# Altium PCB PCB1.PcbDoc
Units mm, origin at the board's own origin, x right, y up, seen from the top; angles counter-clockwise.
Board outline 72.9 x 64.01 mm, 4 copper layers (Top Layer, GND Plane, Power, Bottom Layer), stack 1.369 mm thick; 67 components, 38 nets, 236 pads, 0 vias.
Unrouted connection lines stored in the file: 150.
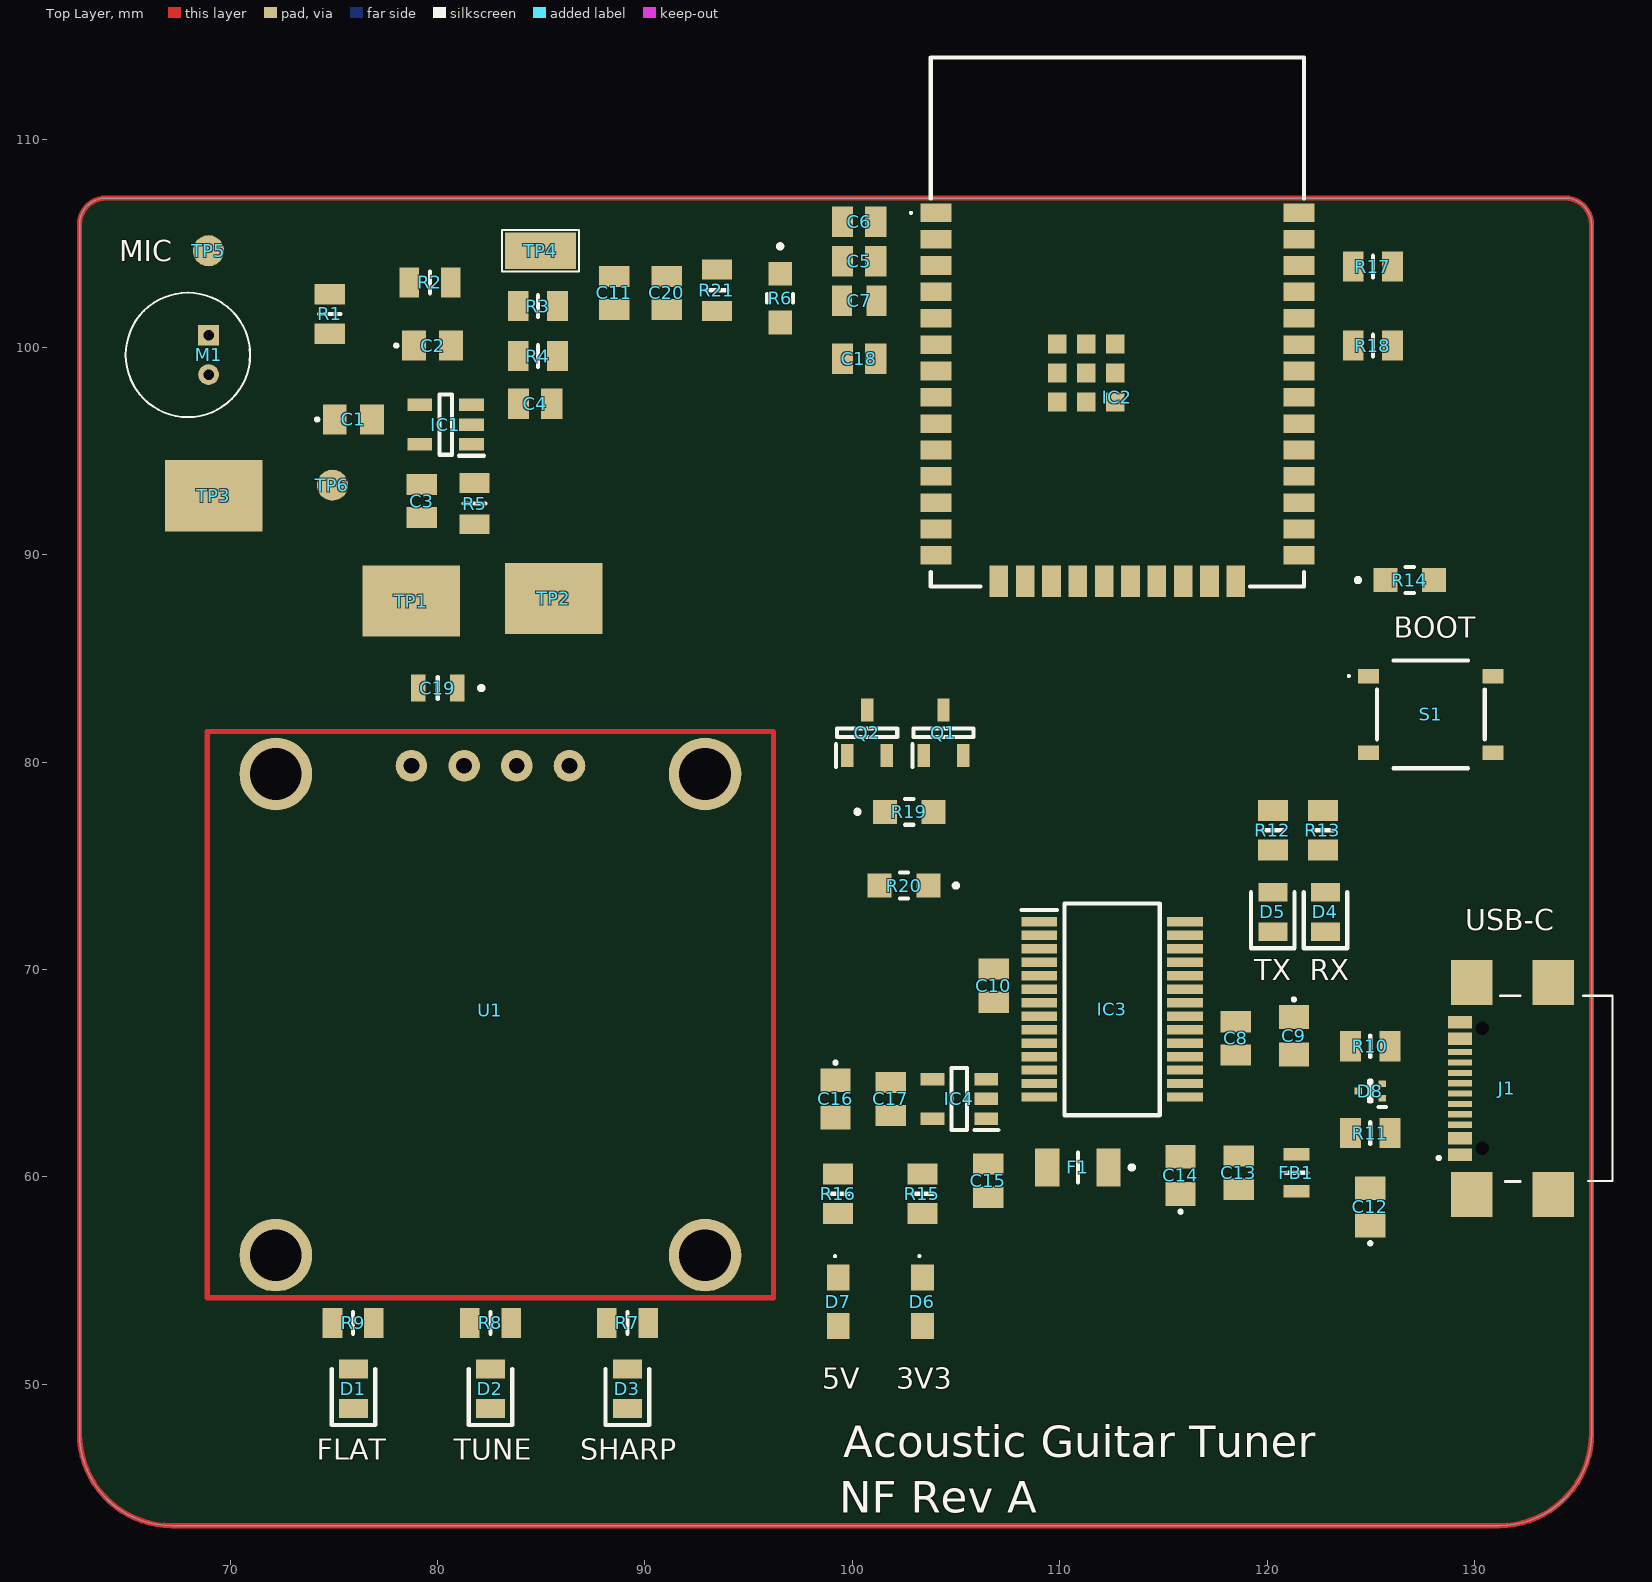
[diagram p0: Top Layer view]
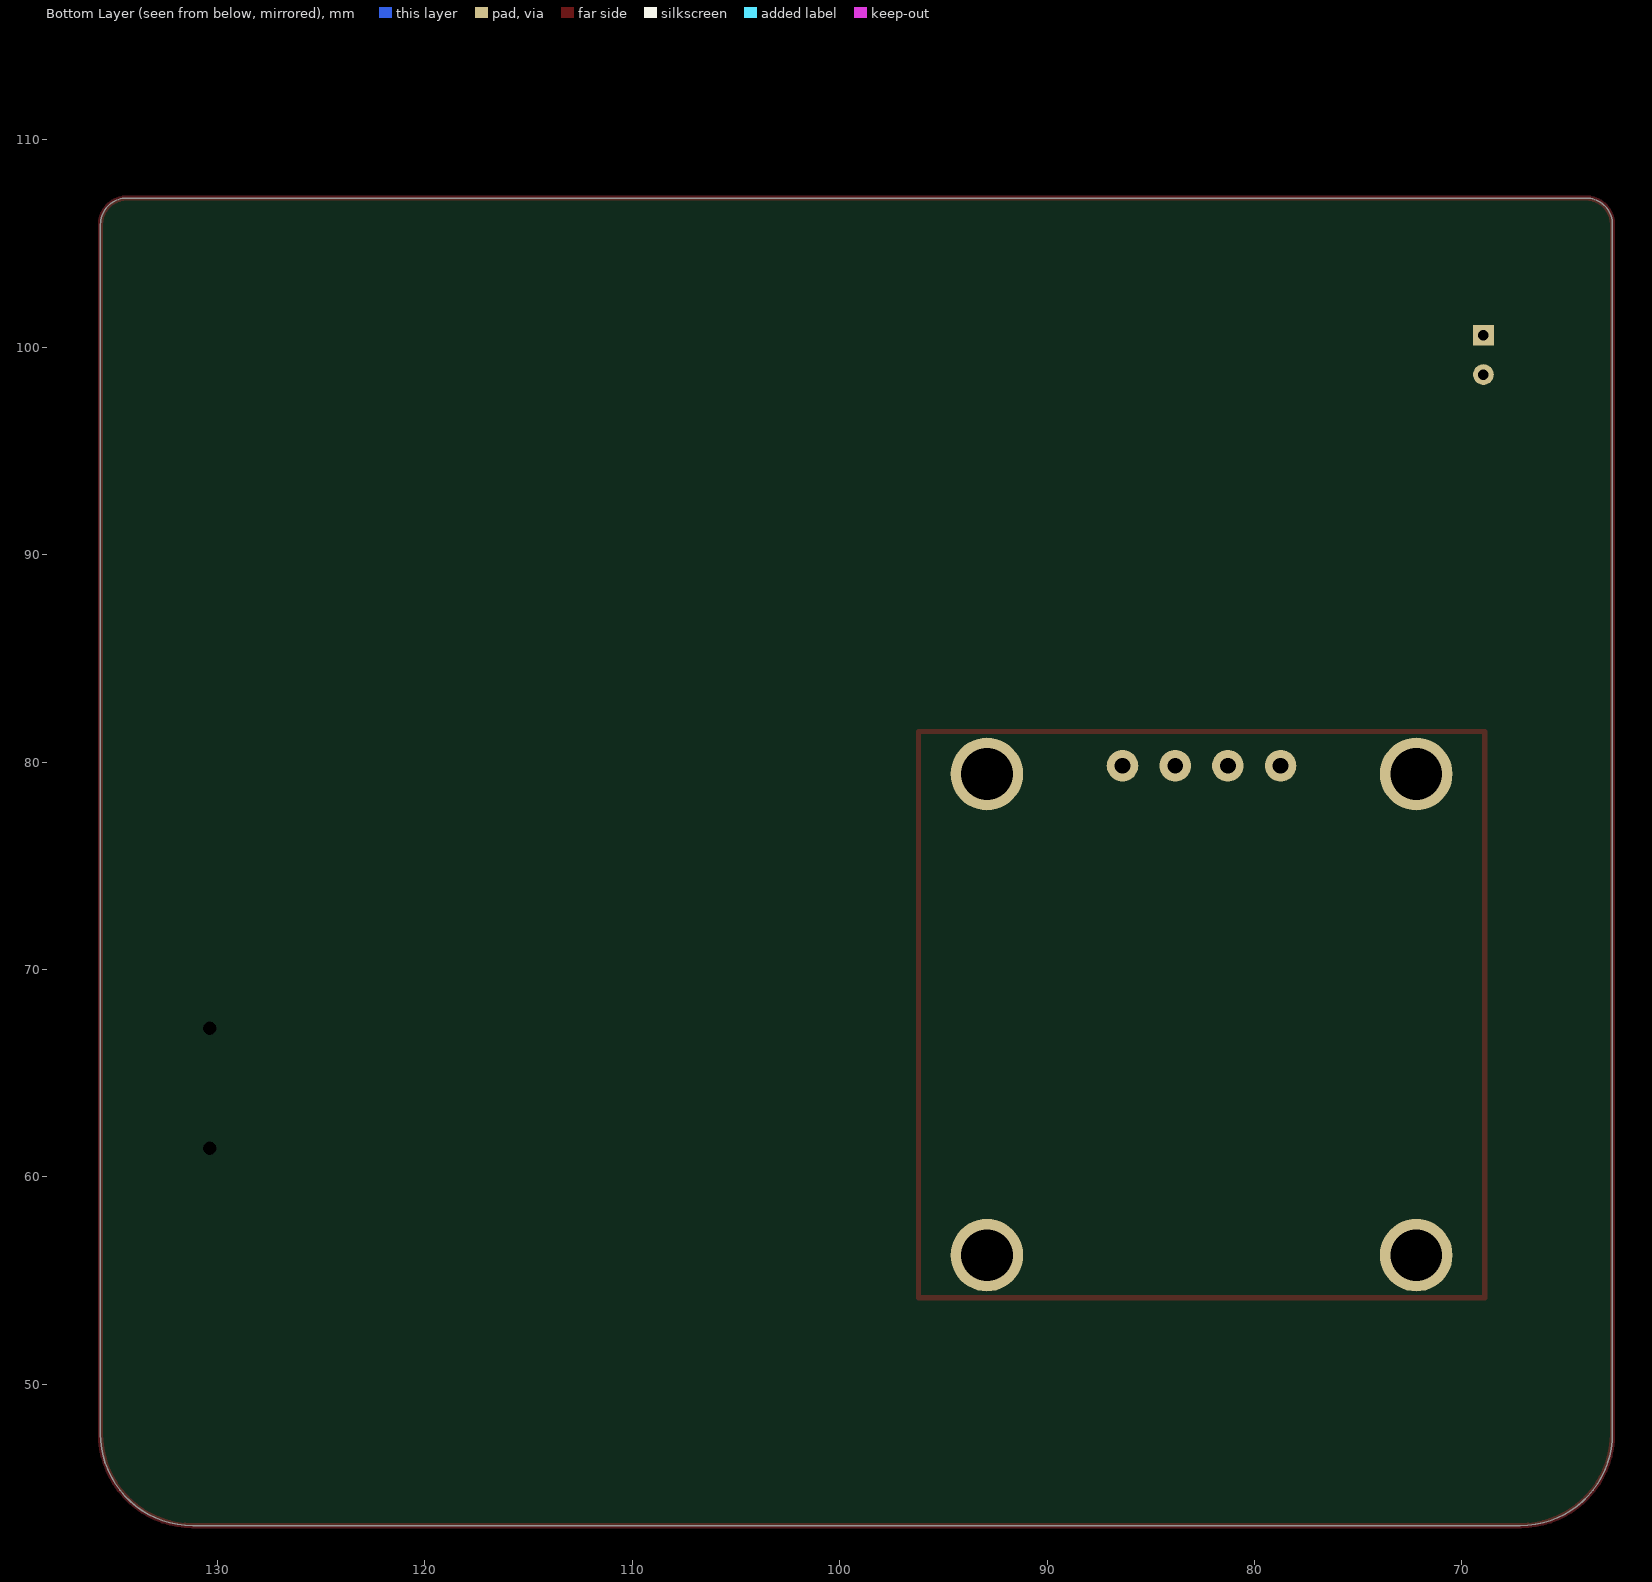
[diagram p1: Bottom Layer view, seen from below]

## Layer stack, top to bottom
Top Solder: solder mask 0.0254, SM-001, Dk 4
Top Layer: signal copper 0.035
Dielectric 1: prepreg 0.1295, PP-017, Dk 4.3
Dielectric 2: prepreg 0.1295, PP-017, Dk 4.3
GND Plane: signal copper 0.035
Dielectric 3: core 0.7112, Core-039, Dk 4.8
Power: signal copper 0.035
Dielectric 4: prepreg 0.1295, PP-017, Dk 4.3
Dielectric 5: prepreg 0.1295, PP-017, Dk 4.3
Bottom Layer: signal copper 0.035
Bottom Solder: solder mask 0.0254, SM-001, Dk 4

## Board outline
62.738,47.625 62.738,105.918 cw(c64.008,105.918) 64.008,107.188 134.366,107.188 cw(c134.366,105.918) 135.636,105.918 135.636,47.625 cw(c131.191,47.625) 131.191,43.18 67.183,43.18 cw(c67.183,47.625)

## Design rules (kind name [scope] priority, off if disabled: settings)
Clearance [All] p1: gap=0.254 ignorepadtopadclearanceinfootprint=FALSE
DiffPairsRouting [All] p1: maxlimit=0.254 minlimit=0.254 mostfreqgap=0.254 toplayer_minwidth=0.381 toplayer_maxwidth=0.381 toplayer_prefwidth=0.381 midlayer1_minwidth=0.381 midlayer1_maxwidth=0.381 midlayer1_prefwidth=0.381 midlayer2_minwidth=0.381 midlayer2_maxwidth=0.381 midlayer2_prefwidth=0.381 bottomlayer_minwidth=0.381 bottomlayer_maxwidth=0.381 bottomlayer_prefwidth=0.381 maxuncoupledlength=12.7
PolygonConnect [All] p1: connectstyle=Relief reliefconductorwidth=0.254 reliefentries=4 polygonreliefangle="90 Angle" airgapwidth=0.254
RoutingVias [All] p1: holewidth=0.711 width=1.27 viastyle="Through Hole" minholewidth=0.711 minwidth=1.27 maxholewidth=0.711 maxwidth=1.27
SolderMaskExpansion [All] p1: expansion=0.102 istentingtop=FALSE
SupplyNets "Schematic Supply Nets_4" [InNet('3V3_A')] p1: voltage=0.000
SupplyNets "Schematic Supply Nets_3" [InNet('3V3')] p2: voltage=0.000
SupplyNets "Schematic Supply Nets_2" [InNet('VBUS')] p3: voltage=0.000
SupplyNets "Schematic Supply Nets_1" [InNet('5V')] p4: voltage=0.000
SupplyNets "Schematic Supply Nets" [InNet('GND')] p5: voltage=0.000
Width [All] p1: maxlimit=0.254 minlimit=0.254 preferedwidth=0.254
29 further rules are at their usual default settings.

## Classes and differential pairs
component class "USB to UART": C8 C9 C10 D4 D5 D8 IC3 J1 Q1 Q2 R10 R11 R12 R13 R19 R20
component class PSU: C11 C12 C13 C14 C15 C16 C17 C20 D6 D7 F1 FB1 IC4 R15 R16 R21
component class "Pre Amp": C1 C2 C3 C4 IC1 M1 R1 R2 R3 R4 R5 TP1 TP2 TP3 TP4 TP5 TP6
component class MCU: C5 C6 C7 C18 C19 D1 D2 D3 IC2 R6 R7 R8 R9 R14 R17 R18 S1 U1
differential pair USB_D: +USB_D_P -USB_D_N

## Components (designator, comment, footprint, x,y, rotation, side; value= is the part's Value field where it differs from the comment)
C1 "2.2uF" C0805 75.946,96.52 r0 top
C2 "1.5nF" C0805 79.756,100.076 r0 top
C3 "0.1uF" CAPC2012X88N 79.248,92.583 r90 top
C4 "10uF" CAPC2012X140N 84.709,97.282 r180 top
C5 "10uF" CAPC2012X140N 100.33,104.14 r0 top
C6 "0.1uF" CAPC2012X88N 100.33,106.045 r0 top
C7 "1uF" CAPC2012X145N 100.33,102.235 r0 top
C8 "0.1uF" CAPC2012X88N 118.491,66.675 r270 top
C9 "4.7uF" C0805 121.285,66.802 r270 top
C10 "0.1uF" CAPC2012X88N 106.807,69.215 r90 top
C11 "10uF" CAPC2012X140N 88.519,102.616 r270 top
C12 "0.01uF" C0805 124.968,58.547 r90 top
C13 "0.1uF" CAPC2012X88N 118.618,60.198 r90 top
C14 "4.7uF" C0805 115.824,60.071 r90 top
C15 "10uF" CAPC2012X140N 106.553,59.817 r90 top
C16 "22uF" C0805 99.187,63.754 r270 top
C17 "0.1uF" CAPC2012X88N 101.854,63.754 r270 top
C18 "0.1uF" CAPC2012X88N 100.33,99.441 r180 top
C19 "1uF" GRM21BR60J226ME39L 80.01,83.566 r180 top
C20 "0.1uF" CAPC2012X88N 91.059,102.616 r270 top
D1 "RED" LEDC2012X85N 75.946,49.784 r90 top
D2 "GRN" LEDC2012X85N 82.55,49.784 r90 top
D3 "BLU" LEDC2012X85N 89.154,49.784 r90 top
D4 "RX_LED" LEDC2012X85N 122.809,72.771 r90 top
D5 "TX_LED" LEDC2012X85N 120.269,72.771 r90 top
D6 "LED" APT2012SECKJ3PRV 103.378,53.975 r270 top
D7 "LED" APT2012SECKJ3PRV 99.314,53.975 r270 top
D8 "ESD Diode" SOTFL35P100X50-3N 124.968,64.135 r180 top
F1 "500mA" 1206L05015YR 110.871,60.452 r180 top
FB1 "120" BLM21AG102BH1J 121.412,60.198 r90 top
IC1 "TLV9061IDBVR" SOT95P280X145-5N 80.391,96.266 r180 top
IC2 "ESP32-WROOM-32E-N16" ESP32WROOM32EN16 112.776,100.965 r0 top
IC3 "FT232RNL-TUBE" SOP65P780X200-28N 112.522,68.072 r0 top
IC4 "AP2112K" SOT95P285X140-5N 105.156,63.754 r180 top
J1 "USB4110GFA" USB4110GFA 132.969,64.262 r90 top
M1 "POM-3535P-3-R" POM3535P3R 68.961,100.579 r270 top
Q1 "SS8050-G" SOT95P240X115-3N 104.394,81.407 r90 top
Q2 "SS8050-G" SOT95P240X115-3N 100.711,81.407 r90 top
R1 "2.61k" RESC2012X60N 74.803,101.6 r90 top
R2 "22k" RESC2012X50N 79.629,103.124 r0 top
R3 "100k" RESC2012X60N 84.836,101.981 r0 top
R4 "100k" RESC2012X60N 84.836,99.568 r180 top
R5 "49.9" RESC2012X50N 81.788,92.456 r270 top
R6 "10k" ERA6AEB101V 96.52,102.362 r270 top
R7 "150" RESC2012X50N 89.154,52.959 r180 top
R8 "150" RESC2012X50N 82.55,52.959 r180 top
R9 "150" RESC2012X50N 75.93,52.959 r180 top
R10 "5.1k" RESC2012X60N 124.968,66.294 r180 top
R11 "5.1k" RESC2012X60N 124.968,62.103 r0 top
R12 "1k" RESC2012X60N 120.269,76.708 r270 top
R13 "1k" RESC2012X60N 122.682,76.708 r270 top
R14 "10k" ERA6AEB101V 126.873,88.773 r0 top
R15 "1k" RESC2012X60N 103.378,59.182 r270 top
R16 "1k" RESC2012X60N 99.314,59.182 r270 top
R17 "4.7k" RESC2012X60N 125.095,103.886 r0 top
R18 "4.7k" RESC2012X60N 125.095,100.076 r0 top
R19 "10k Resistor 0805" ERA6AEB101V 102.743,77.597 r0 top
R20 "10k Resistor 0805" ERA6AEB101V 102.489,74.041 r180 top
R21 "10" RESC2012X50N 93.472,102.743 r270 top
S1 "PTS526SM15SMTR2_LFS" PTS526SM15SMTR2LFS 127.889,82.296 r0 top
TP1 "5016" 5016 78.74,87.757 r0 top
TP2 "5016" 5016 85.598,87.884 r0 top
TP3 "5016" 5016 69.215,92.837 r0 top
TP4 "5015" 5015 84.963,104.648 r0 top
TP5 "1.5mm" TESTPAD_1P5MM 68.961,104.648 r90 top
TP6 "1.5mm" TESTPAD_1P5MM 74.93,93.345 r90 top
U1 "WEA012864DWPP3N00003" OLED_128x64_I2C 82.55,66.929 r0 top

## Footprints (in the part's own frame and the unit in brackets; to place one, negate y for a bottom-side part, rotate by r counter-clockwise, add the part's x,y. Pads: shape width x height; smd on the part's side, far side on the other; paste and mask are expansions set on the pad)
1206L05015YR [mm]
  rect 1.16x1.82 smd: 1(-1.475,0) 2(1.475,0)
  silkscreen extent -2.7,-0.72 0,0.72, body extent -1.6,-0.83 1.6,0.83, height 0.75
5015 [mm]
  rect 3.43x1.78 smd: 1(0,0)
  silkscreen extent -1.85,-1 1.85,1, body extent -1.35,-0.5 1.35,0.5, height 1.5
5016 [mm]
  rect 4.7x3.43 smd: 1(0,0)
  body extent -1.88,-0.01 1.93,2.28, height 2.89
APT2012SECKJ3PRV [mm]
  rect 1.25x1.1 smd: 1(-1.175,0) 2(1.175,0)
  silkscreen extent -2.25,-0.2 -2.15,-0.1, body extent -1,-0.63 1,0.63, height 0.75
BLM21AG102BH1J [mm]
  rect 0.6x1.25 smd: 1(-0.9,0) 2(0.9,0)
  silkscreen extent 0,-0.53 0,0.53, body extent -1,-0.63 1,0.63, height 0.85
C0805 [mm]
  rect 1.15x1.45 smd: 1(-0.9,0) 2(0.9,0)
  silkscreen extent -1.8,-0.05 -1.7,0.05, body extent -1.15,-0.78 1.15,0.77, height 0.98
CAPC2012X88N [mm]
  rect 1.02x1.47 smd: 1(-0.8,0) 2(0.8,0)
  body extent -1.1,-0.73 1.1,0.72, height 0.88
CAPC2012X140N [mm]
  rect 1.02x1.47 smd: 1(-0.8,0) 2(0.8,0)
  body extent -1.1,-0.73 1.1,0.72, height 1.4
CAPC2012X145N [mm]
  rect 0.97x1.47 smd: 1(-0.83,0) 2(0.83,0)
  body extent -1,-0.63 1,0.63, height 1.45
ERA6AEB101V [mm]
  rect 1.15x1.15 smd: 1(-1.175,0) 2(1.175,0)
  silkscreen extent -2.6,-0.63 0.2,0.63, body extent -1,-0.63 1,0.63, height 0.5
ESP32WROOM32EN16 [mm]
  rect 1.5x0.9 smd: 1(-8.75,5.51) 2(-8.75,4.24) 3(-8.75,2.97) 4(-8.75,1.7) 5(-8.75,0.43) 6(-8.75,-0.84) 7(-8.75,-2.11) 8(-8.75,-3.38) 9(-8.75,-4.65) 10(-8.75,-5.92) 11(-8.75,-7.19) 12(-8.75,-8.46) 13(-8.75,-9.73) 14(-8.75,-11) 25(8.75,-11) 26(8.75,-9.73) 27(8.75,-8.46) 28(8.75,-7.19) 29(8.75,-5.92) 30(8.75,-4.65) 31(8.75,-3.38) 32(8.75,-2.11) 33(8.75,-0.84) 34(8.75,0.43) 35(8.75,1.7) 36(8.75,2.97) 37(8.75,4.24) 38(8.75,5.51)
  rect 0.9x1.5 smd: 15(-5.715,-12.25) 16(-4.445,-12.25) 17(-3.175,-12.25) 18(-1.905,-12.25) 19(-0.635,-12.25) 20(0.635,-12.25) 21(1.905,-12.25) 22(3.175,-12.25) 23(4.445,-12.25) 24(5.715,-12.25)
  rect 0.9x0.9 smd: 39(-1.5,-2.21) 40(-1.5,-0.81) 41(-2.9,-0.81) 42(-2.9,-2.21) 43(-2.9,-3.61) 44(-1.5,-3.61) 45(-0.1,-3.61) 46(-0.1,-2.21) 47(-0.1,-0.81)
  silkscreen extent -10,-12.5 9,13, body extent -9,-12.75 9,12.75, height 4.05
GRM21BR60J226ME39L [mm]
  rect 0.7x1.3 smd: 1(-0.95,0) 2(0.95,0)
  silkscreen extent -2.2,-0.53 0,0.53, body extent -1,-0.63 1,0.63, height 1
LEDC2012X85N [mm]
  rect 0.9x1.4 smd: 1(-0.95,0) 2(0.95,0)
  silkscreen extent -1.75,-1.05 0.95,1.05
OLED_128x64_I2C [mm] "WEA012864DWPP3N00003"
  round 1.524 hole 0.762: 1(-3.81,12.893) 2(-1.27,12.893) 3(1.27,12.893) 4(3.81,12.893)
  round 3.5 hole 2.5: 6(-10.35,12.493) 7(10.35,12.493) 8(10.35,-10.707) 9(-10.35,-10.707)
  Top Layer lines w0.254: -13.65,-12.757 -13.65,14.543 13.65,14.543 13.65,-12.757 -13.65,-12.757
  body extent -13.65,-12.76 13.65,14.54, height 2.64
POM3535P3R [mm]
  rect 1x1 hole 0.5: 1(0,0)
  round 1 hole 0.5: 2(1.9,0)
  silkscreen extent -2.05,-4 3.95,2, body extent -2.05,-4 3.95,2, height 4.1
PTS526SM15SMTR2LFS [mm]
  rect 1x0.7 smd: 1(-3,1.85) 2(3,1.85) 3(-3,-1.85) 4(3,-1.85)
  silkscreen extent -4,-2.6 2.6,2.6, body extent -3.2,-2.55 3.2,2.55, height 1.55
RESC2012X50N [mm]
  rect 0.95x1.45 smd: 1(-1,0) 2(1,0)
  silkscreen extent 0,-0.53 0,0.53, body extent -1,-0.62 1,0.63, height 0.45
RESC2012X60N [mm]
  rect 1x1.45 smd: 1(-0.95,0) 2(0.95,0)
  silkscreen extent 0,-0.53 0,0.53, body extent -1,-0.63 1,0.63, height 0.6
SOP65P780X200-28N [mm]
  rect 1.725x0.45 smd: 1(-3.512,4.225) 2(-3.512,3.575) 3(-3.512,2.925) 4(-3.512,2.275) 5(-3.512,1.625) 6(-3.512,0.975) 7(-3.512,0.325) 8(-3.512,-0.325) 9(-3.512,-0.975) 10(-3.512,-1.625) 11(-3.512,-2.275) 12(-3.512,-2.925) 13(-3.512,-3.575) 14(-3.512,-4.225) 15(3.512,-4.225) 16(3.512,-3.575) 17(3.512,-2.925) 18(3.512,-2.275) 19(3.512,-1.625) 20(3.512,-0.975) 21(3.512,-0.325) 22(3.512,0.325) 23(3.512,0.975) 24(3.512,1.625) 25(3.512,2.275) 26(3.512,2.925) 27(3.512,3.575) 28(3.512,4.225)
  silkscreen extent -4.38,-5.1 2.3,5.1, body extent -3.9,-5.1 3.9,5.1, height 2
SOT95P240X115-3N [mm]
  rect 1.1x0.6 smd: 1(-1.1,0.95) 2(-1.1,-0.95) 3(1.1,0)
  silkscreen extent -1.65,-1.45 0.2,1.5, body extent -1.2,-1.45 1.2,1.45, height 1.15
SOT95P280X145-5N [mm]
  rect 1.2x0.6 smd: 1(-1.25,0.95) 2(-1.25,0) 3(-1.25,-0.95) 4(1.25,-0.95) 5(1.25,0.95)
  silkscreen extent -1.85,-1.45 0.3,1.5, body extent -1.4,-1.45 1.4,1.45, height 1.45
SOT95P285X140-5N [mm]
  rect 1.15x0.6 smd: 1(-1.3,0.95) 2(-1.3,0) 3(-1.3,-0.95) 4(1.3,-0.95) 5(1.3,0.95)
  silkscreen extent -1.88,-1.5 0.38,1.5, body extent -1.43,-1.5 1.43,1.5, height 1.4
SOTFL35P100X50-3N [mm]
  rect 0.36x0.33 smd: 1(-0.58,0.35) 2(-0.58,-0.35) 3(0.58,0)
  silkscreen extent -0.76,-0.5 0.05,0.76, body extent -0.5,-0.5 0.5,0.5, height 0.5
TESTPAD_1P5MM [mm]
  round 1.5 smd paste-2539.97 mask+0.1: 1(0,0)
USB4110GFA [mm]
  rect 0.3x1.15 smd: A1(-3.35,3.678) A4(-2.55,3.678) A5(-1.25,3.678) A6(-0.25,3.678) A7(0.25,3.678) A8(1.25,3.678) A9(2.55,3.678) A12(3.35,3.678) B1(3.05,3.678) B4(2.25,3.678) B5(1.75,3.678) B6(0.75,3.678) B7(-0.75,3.678) B8(-1.75,3.678) B9(-2.25,3.678) B12(-3.05,3.678)
  round 0.325 hole 0.65 unplated: MH1(-2.89,2.603) MH2(2.89,2.603)
  rect 2.18x2 smd: MP1(-5.11,-0.827) MP2(5.11,-0.827) MP3(-5.11,3.103) MP4(5.11,3.103)
  silkscreen extent -4.5,-3.68 4.47,4.75, body extent -5.65,-3.68 5.65,4.02, height 3.26

## Part data
C1: library part "2.2uF Capacitor 0805", "Capacitor", Arrow Part Number=C0805C225K8PACTU, Manufacturer_Name="Yageo Group", Mouser Part Number=80-C0805C225K8P, Arrow Price/Stock=https://www.arrow.com/en/products/c0805c225k8pactu/kemet-corporation?region=nac, Datasheet Link=https://www.yageogroup.com/content/datasheet/asset/file/KEM_C1006_X5R_SMD, Height=1.1mm, Manufacturer_Part_Number=C0805C225K8PACTU, Mouser Price/Stock=https://www.mouser.co.uk/ProductDetail/KEMET/C0805C225K8PACTU?qs=hIohqi1S7IpPfscGpw9Z0g%3D%3D
C2: library part "1.5nF Capaciator 0805", "Capacitor", Manufacturer_Name="Yageo Group", Manufacturer_Part_Number=C0805C152J5GACTU, Datasheet Link=https://www.yageogroup.com/content/datasheet/asset/file/KEM_C1003_C0G_SMD, Height=1.1mm
C3 C6 C8 C10 C13 C17 C18 C20: library part "0.1uF Capacitor 0805", "Capacitor", Arrow Part Number=C0805C104K5RAC-TU, Manufacturer_Name="Yageo Group", Arrow Price/Stock=https://www.arrow.com/en/products/c0805c104k5ractu/kemet-corporation, Datasheet Link=https://componentsearchengine.com/Datasheets/2/C0805C104K5RAC-TU.pdf, Height=0.88mm, Manufacturer_Part_Number=C0805C104K5RAC-TU
C4 C5 C11 C15: library part "10uF Capacitor 0805", "Capacitor", Manufacturer_Name="Yageo Group", Manufacturer_Part_Number=C0805C106K8PACTU-2.5, Mouser Part Number=N/A, Datasheet Link=https://www.kemet.com/specsheet/C0805C106K8PACTU, Height=1.4mm, Mouser Price/Stock=https://www.mouser.com/Search/Refine.aspx?Keyword=N%2FA
C7: library part "1uF Capacitor 0805", "Capacitor", Arrow Part Number=GRM21BR71A105KA01L, Manufacturer_Name="Murata Electronics", Mouser Part Number=81-GRM40X105K10L, Arrow Price/Stock=https://www.arrow.com/en/products/grm21br71a105ka01l/murata-manufacturing, Datasheet Link=https://search.murata.co.jp/Ceramy/image/img/A01X/G101/ENG/GRM21BR71A105KA01-01A.pdf, Height=1.45mm, Manufacturer_Part_Number=GRM21BR71A105KA01L, Mouser Price/Stock=https://www.mouser.co.uk/ProductDetail/Murata-Electronics/GRM21BR71A105KA01L?qs=Rc6BINVvJ%2FjIxBp0DnLtzA%3D%3D
C9 C14: library part "4.7uF Capacitor 0805", "Capacitor", Arrow Part Number=C0805X475M8RACTU, Manufacturer_Name="Yageo Group", Mouser Part Number=80-C0805X475M8R, Arrow Price/Stock=https://www.arrow.com/en/products/c0805x475m8ractu/kemet-corporation, Datasheet Link=https://www.yageogroup.com/content/datasheet/asset/file/KEM_C1013_X7R_FT-CAP_SMD, Height=1.1mm, Manufacturer_Part_Number=C0805X475M8RACTU, Mouser Price/Stock=https://www.mouser.com/Search/Refine.aspx?Keyword=80-C0805X475M8R
C12: library part "0.01uF Capacitor 0805", "Capacitor", Manufacturer_Name="Yageo Group", Manufacturer_Part_Number=C0805C103K1RECTU, Datasheet Link=https://www.yageogroup.com/content/datasheet/asset/file/KEM_C1090_X7R_ESD, Height=1.1mm
C16: library part "22uF Capacitor 0805", "Capacitor", Manufacturer_Name="Yageo Group", Manufacturer_Part_Number=C0805C226M8PAC7210, Mouser Part Number=80-C0805C226M8P7210, Datasheet Link=https://www.yageogroup.com/content/datasheet/asset/file/KEM_C1006_X5R_SMD, Height=1.1mm, Mouser Price/Stock=https://www.mouser.co.uk/ProductDetail/KEMET/C0805C226M8PAC7210?qs=cGEy3R83DS8oofmRMj%2F42w%3D%3D
C19: library part "1uF Capacitor", "Capacitor", Arrow Part Number=GRM21BR61A105KA01L, Manufacturer_Name="Murata Electronics", Mouser Part Number=81-GRM21R61A105KA01L, Arrow Price/Stock=https://www.arrow.com/en/products/grm21br61a105ka01l/murata-manufacturing, Datasheet Link=https://search.murata.co.jp/Ceramy/image/img/A01X/G101/ENG/GRM21BR61A105KA01-01A.pdf, Height=1.45mm, Manufacturer_Part_Number=GRM21BR61A105KA01L, Mouser Price/Stock=https://www.mouser.co.uk/ProductDetail/Murata-Electronics/GRM21BR61A105KA01L?qs=E0xLyVzY5mZAKW6GqdeKBA%3D%3D
D1: library part "Red LED", "LED", Arrow Part Number=APT2012EC, Manufacturer_Name=Kingbright, Mouser Part Number=604-APT2012EC, Arrow Price/Stock=https://www.arrow.com/en/products/apt2012ec/kingbright?region=nac, Datasheet Link=http://www.us.kingbright.com/images/catalog/SPEC/APT2012EC.pdf, Height=0.85mm, Manufacturer_Part_Number=APT2012EC, Mouser Price/Stock=https://www.mouser.co.uk/ProductDetail/Kingbright/APT2012EC?qs=sXafwHSx%252BU%252BiK4iO%2FHnV4A%3D%3D
D2 D4 D5: library part "Green LED", "LED", Arrow Part Number=APT2012SGC, Manufacturer_Name=Kingbright, Mouser Part Number=604-APT2012SGC, Arrow Price/Stock=https://www.arrow.com/en/products/apt2012sgc/kingbright?region=nac, Datasheet Link=http://www.us.kingbright.com/images/catalog/SPEC/APT2012SGC.pdf, Height=0.85mm, Manufacturer_Part_Number=APT2012SGC, Mouser Price/Stock=https://www.mouser.co.uk/ProductDetail/Kingbright/APT2012SGC?qs=SxaZfIVsCL28XycY%2FuxqiQ%3D%3D
D3: library part "Blue LED", "LED", Arrow Part Number=APT2012LVBC/D, Manufacturer_Name=Kingbright, Mouser Part Number=604-APT2012LVBCD, Arrow Price/Stock=https://www.arrow.com/en/products/apt2012lvbcd/kingbright?utm_currency=USD&region=nac, Datasheet Link=https://componentsearchengine.com/Datasheets/1/APT2012LVBC_D.pdf, Height=0.85mm, Manufacturer_Part_Number=APT2012LVBC/D, Mouser Price/Stock=https://www.mouser.co.uk/ProductDetail/Kingbright/APT2012LVBC-D?qs=6oMev5NRZMGErJYT6KZLXg%3D%3D
D6 D7: library part "Orange LED", Arrow Part Number=APT2012SECK/J3-PRV, Manufacturer_Name=Kingbright, Mouser Part Number=604-APT2012SECKJ3PRV, Arrow Price/Stock=https://www.arrow.com/en/products/apt2012seckj3-prv/kingbright?region=nac, Datasheet Link=https://www.mouser.ph/ProductDetail/Kingbright/APT2012SECK-J3-PRV?qs=D2TOvUWgdJ6T9J6WfI%252BQOg%3D%3D, Height=0.85mm, Manufacturer_Part_Number=APT2012SECK/J3-PRV, Mouser Price/Stock=https://www.mouser.co.uk/ProductDetail/Kingbright/APT2012SECK-J3-PRV?qs=D2TOvUWgdJ6T9J6WfI%252BQOg%3D%3D
D8: "Diode", Arrow Part Number=TPD2EUSB30DRTR, Manufacturer_Name="Texas Instruments", Mouser Part Number=595-TPD2EUSB30DRTR, Arrow Price/Stock=https://www.arrow.com/en/products/tpd2eusb30drtr/texas-instruments?utm_currency=USD&region=nac, Datasheet Link=https://datasheet.datasheetarchive.com/originals/distributors/SFDatasheet-11/sf-000234749.pdf, Height=0.5mm, Manufacturer_Part_Number=TPD2EUSB30DRTR, Mouser Price/Stock=https://www.mouser.co.uk/ProductDetail/Texas-Instruments/TPD2EUSB30DRTR?qs=%2Fqzd9s%252BcLd6bPJi5HXCDvw%3D%3D
F1: library part "500mA Fuse", "Resettable Fuse", Arrow Part Number=1206L050YR, Manufacturer_Name=LITTELFUSE, Mouser Part Number=576-1206L050YR, Arrow Price/Stock=https://www.arrow.com/en/products/1206l050yr/littelfuse.html?utm_currency=USD&region=europe, Datasheet Link=https://m.littelfuse.com/~/media/electronics/datasheets/resettable_ptcs/littelfuse_ptc_1206l_datasheet.pdf.pdf, Height=0.75mm, Manufacturer_Part_Number=1206L050YR, Mouser Price/Stock=https://www.mouser.co.uk/ProductDetail/Littelfuse/1206L050YR?qs=PWhpLWeW8wckT8hV5jLiAA%3D%3D
FB1: library part "120 Ferrite Bead", "Filter", Arrow Part Number=BLM21PG121SN1D, Manufacturer_Name="Murata Electronics", Mouser Part Number=81-BLM21PG121SN1D, Arrow Price/Stock=https://www.arrow.com/en/products/blm21pg121sn1d/murata-manufacturing?utm_currency=USD&region=europe, Datasheet Link=https://www.murata.com/en-us/products/productdetail?partno=BLM21PG121SN1%23, Height=1.05mm, Manufacturer_Part_Number=BLM21PG121SN1D, Mouser Price/Stock=https://www.mouser.co.uk/ProductDetail/Murata-Electronics/BLM21PG121SN1D?qs=MY6wChARw2zaR3kESBLGTQ%3D%3D
IC1: "Integrated Circuit", Manufacturer_Name="Texas Instruments", Mouser Part Number=595-TLV9061IDBVR, Arrow Part Number=TLV9061IDBVR, Arrow Price/Stock=https://www.arrow.com/en/products/tlv9061idbvr/texas-instruments?utm_currency=USD&region=nac, Datasheet Link=http://www.ti.com/lit/gpn/tlv9061, Height=1.45mm, Manufacturer_Part_Number=TLV9061IDBVR, Mouser Price/Stock=https://www.mouser.co.uk/ProductDetail/Texas-Instruments/TLV9061IDBVR?qs=w%2Fv1CP2dgqpra2GA6pq5aQ%3D%3D
IC2: "Integrated Circuit", Manufacturer_Name="Espressif Systems", Mouser Part Number=356-ESP32WRM32E128PH, Datasheet Link=https://www.espressif.com/sites/default/files/documentation/esp32-wroom-32e_esp32-wroom-32ue_datasheet_en.pdf, Height=3.25mm, Manufacturer_Part_Number=ESP32-WROOM-32E-N16, Mouser Price/Stock=https://www.mouser.co.uk/ProductDetail/Espressif-Systems/ESP32-WROOM-32E-N16?qs=Li%252BoUPsLEnsC4cA%252BUYB2Bw%3D%3D
IC3: "Integrated Circuit", Manufacturer_Name="FTDI Chip", Mouser Part Number=895-FT232RNL-TUBE, Arrow Part Number=FT232RNL-TUBE, Arrow Price/Stock=https://www.arrow.com/en/products/ft232rnl-tube/ftdi-chip?utm_currency=USD&region=europe, Datasheet Link=https://ftdichip.com/wp-content/uploads/2023/03/DS_FT232RN.pdf, Height=2mm, Manufacturer_Part_Number=FT232RNL-TUBE, Mouser Price/Stock=https://www.mouser.co.uk/ProductDetail/FTDI/FT232RNL-TUBE?qs=By6Nw2ByBD3n6DWgWW3egA%3D%3D
IC4: library part LDO, "Integrated Circuit", Arrow Part Number=AP2112K-3.3TRG1, Manufacturer_Name="Diodes Incorporated", Mouser Part Number=621-AP2112K-3.3TRG1, Arrow Price/Stock=https://www.arrow.com/en/products/ap2112k-3-3trg1_3/diodes-incorporated.html?utm_currency=USD&region=nac, Datasheet Link=https://www.diodes.com//assets/Datasheets/AP2112.pdf, Height=1.4mm, Manufacturer_Part_Number=AP2112K-3.3TRG1, Mouser Price/Stock=https://www.mouser.co.uk/ProductDetail/Diodes-Incorporated/AP2112K-3.3TRG1?qs=x6A8l6qLYDDPYHosCdzh%2FA%3D%3D
J1: library part "USB-C Receptacle", "Connector", Manufacturer_Name="GCT (GLOBAL CONNECTOR TECHNOLOGY)", Manufacturer_Part_Number=USB4110-GF-A, Mouser Part Number=640-USB4110-GF-A, Datasheet Link=https://gct.co/files/drawings/usb4110.pdf, Height=3.26mm, Mouser Price/Stock=https://www.mouser.co.uk/ProductDetail/GCT/USB4110-GF-A?qs=KUoIvG%2F9IlYiZvIXQjyJeA%3D%3D
M1: library part "Electret Microphone", "Microphone", Manufacturer_Name="PUI Audio", Mouser Part Number=665-POM-3535P-3-R, Datasheet Link=https://componentsearchengine.com/Datasheets/1/POM-3535P-3-R.pdf, Height=4mm, Manufacturer_Part_Number=POM-3535P-3-R, Mouser Price/Stock=https://www.mouser.co.uk/ProductDetail/PUI-Audio/POM-3535P-3-R?qs=SFtkwOqhffnBMPjb%2F%2FZCSg%3D%3D
Q1 Q2: "Transistor BJT NPN", Manufacturer_Name="Comchip Technology", Mouser Part Number=750-SS8050-G, Arrow Part Number=SS8050-G, Arrow Price/Stock=https://www.arrow.com/en/products/ss8050-g/comchip-technology?region=nac, Datasheet Link=https://datasheet.datasheetarchive.com/originals/distributors/DKDS-12/229454.pdf, Height=1.15mm, Manufacturer_Part_Number=SS8050-G, Mouser Price/Stock=https://www.mouser.co.uk/ProductDetail/Comchip-Technology/SS8050-G?qs=LLUE9lz1YbcHg%252BWLMAtcrQ%3D%3D
R1: library part "2.61k Resistor 0805", "Resistor", Arrow Part Number=RC0805FR-072K61L, Manufacturer_Name="Yageo Group", Mouser Part Number=603-RC0805FR-072K61L, Arrow Price/Stock=https://www.arrow.com/en/products/rc0805fr-072k61l/yageo?region=nac, Datasheet Link=http://www.yageo.com/documents/recent/PYu-RC_Group_51_RoHS_L_10.pdf, Height=0.6mm, Manufacturer_Part_Number=RC0805FR-072K61L, Mouser Price/Stock=https://www.mouser.co.uk/ProductDetail/Yageo/RC0805FR-072K61L?qs=QrWOOBGzeCaZVRFf6Fg7Ew%3D%3D
R2: library part "22k Resistor 0805", "Resistor", Arrow Part Number=CRCW080522K0FKEA, Manufacturer_Name=Vishay, Mouser Part Number=71-CRCW0805-22K-E3, Arrow Price/Stock=https://www.arrow.com/en/products/crcw080522k0fkea/vishay?region=europe, Datasheet Link=http://www.vishay.com/docs/20035/dcrcwe3.pdf, Height=0.5mm, Manufacturer_Part_Number=CRCW080522K0FKEA, Mouser Price/Stock=https://www.mouser.co.uk/ProductDetail/Vishay-Dale/CRCW080522K0FKEA?qs=fIsz7OpyEY835T0D7WGkRw%3D%3D
R3 R4: library part "100k Resistor", "Resistor", Arrow Part Number=CRCW0805100KFKEAHP, Manufacturer_Name=Vishay, Mouser Part Number=71-CRCW0805100KFKEAH, Arrow Price/Stock=https://www.arrow.com/en/products/crcw0805100kfkeahp/vishay.html?utm_currency=USD&region=europe, Datasheet Link=https://componentsearchengine.com/Datasheets/1/CRCW08051R00FKEAHP.pdf, Height=0.6mm, Manufacturer_Part_Number=CRCW0805100KFKEAHP, Mouser Price/Stock=https://www.mouser.co.uk/ProductDetail/Vishay-Dale/CRCW0805100KFKEAHP?qs=k2%2FDWSARqgFvzezk%252B9pwaw%3D%3D
R5: library part "49.9 Resistor", "Resistor", Arrow Part Number=CRCW080549R9FKEA, Manufacturer_Name=Vishay, Mouser Part Number=71-CRCW0805-49.9-E3, Arrow Price/Stock=https://www.arrow.com/en/products/crcw080549r9fkea/vishay, Datasheet Link=http://www.vishay.com/docs/20035/dcrcwe3.pdf, Height=0.5mm, Manufacturer_Part_Number=CRCW080549R9FKEA, Mouser Price/Stock=https://www.mouser.co.uk/ProductDetail/Vishay-Dale/CRCW080549R9FKEA?qs=kkyyugUlSrO9cI3mexpXiA%3D%3D
R6 R14: library part "10k Resistor 0805", "Resistor", Arrow Part Number=ERA-6AED103V, Manufacturer_Name=Panasonic, Mouser Part Number=667-ERA-6AED103V, Arrow Price/Stock=https://www.arrow.com/en/products/era-6aed103v/panasonic?region=nac, Datasheet Link=https://industrial.panasonic.com/cdbs/www-data/pdf/RDM0000/AOA0000C307.pdf, Height=0.6mm, Manufacturer_Part_Number=ERA-6AED103V, Mouser Price/Stock=https://www.mouser.co.uk/ProductDetail/Panasonic/ERA-6AED103V?qs=MNPzkKEzRtSGdYymydDO9g%3D%3D
R7 R8 R9: library part "150 Resistor 0805", "Resistor", Arrow Part Number=CRCW0805150RFKEA, Manufacturer_Name=Vishay, Mouser Part Number=71-CRCW0805-150-E3, Arrow Price/Stock=https://www.arrow.com/en/products/crcw0805150rfkea/vishay?region=nac, Datasheet Link=http://www.vishay.com/docs/20035/dcrcwe3.pdf, Height=0.5mm, Manufacturer_Part_Number=CRCW0805150RFKEA, Mouser Price/Stock=https://www.mouser.co.uk/ProductDetail/Vishay-Dale/CRCW0805150RFKEA?qs=bMjB6bAaLEMlCPoDkVBLpg%3D%3D
R10 R11: library part "5.1k Resistor 0805", "Resistor", Manufacturer_Name=Vishay, Manufacturer_Part_Number=CRCW08055K10JNEAHP, Mouser Part Number=71-CRCW08055K10JNEAH, Datasheet Link=https://componentsearchengine.com/Datasheets/1/CRCW08051R00FKEAHP.pdf, Height=0.6mm, Mouser Price/Stock=https://www.mouser.co.uk/ProductDetail/Vishay/CRCW08055K10JNEAHP?qs=hWgE7mdIu5RTpd75lMnc9Q%3D%3D
R12 R13 R15 R16: library part "1k Resistor", "Resistor", Arrow Part Number=RC0805FR-071KL, Manufacturer_Name="Yageo Group", Mouser Part Number=603-RC0805FR-071KL, Arrow Price/Stock=https://www.arrow.com/en/products/rc0805fr-071kl/yageo?utm_currency=USD&region=europe, Datasheet Link=https://www.yageo.com/upload/media/product/productsearch/datasheet/rchip/PYu-RC_Group_51_RoHS_L_11.pdf, Height=0.6mm, Manufacturer_Part_Number=RC0805FR-071KL, Mouser Price/Stock=https://www.mouser.co.uk/ProductDetail/YAGEO/RC0805FR-071KL?qs=1ogmaHw32WJjeGY0DHXakQ%3D%3D
R17 R18: library part "4.7k Resistor 0805", "Resistor", Arrow Part Number=RC0805FR-074K7L, Manufacturer_Name="Yageo Group", Mouser Part Number=603-RC0805FR-074K7L, Arrow Price/Stock=https://www.arrow.com/en/products/rc0805fr-074k7l/yageo?utm_currency=USD&region=nac, Datasheet Link=http://www.yageo.com/documents/recent/PYu-RC_Group_51_RoHS_L_10.pdf, Height=0.6mm, Manufacturer_Part_Number=RC0805FR-074K7L, Mouser Price/Stock=https://www.mouser.co.uk/ProductDetail/YAGEO/RC0805FR-074K7L?qs=VLOqbHBAO5cYXbrd7RTmuQ%3D%3D
R19 R20: "Resistor", Arrow Part Number=ERA-6AED103V, Manufacturer_Name=Panasonic, Mouser Part Number=667-ERA-6AED103V, Arrow Price/Stock=https://www.arrow.com/en/products/era-6aed103v/panasonic?region=nac, Datasheet Link=https://industrial.panasonic.com/cdbs/www-data/pdf/RDM0000/AOA0000C307.pdf, Height=0.6mm, Manufacturer_Part_Number=ERA-6AED103V, Mouser Price/Stock=https://www.mouser.co.uk/ProductDetail/Panasonic/ERA-6AED103V?qs=MNPzkKEzRtSGdYymydDO9g%3D%3D
R21: library part "10 Resistor 0805", "Resistor", Arrow Part Number=CRCW080510R0FKEA, Manufacturer_Name=Vishay, Mouser Part Number=71-CRCW0805-10-E3, Arrow Price/Stock=https://www.arrow.com/en/products/crcw080510r0fkea/vishay, Datasheet Link=http://www.vishay.com/docs/20035/dcrcwe3.pdf, Height=0.5mm, Manufacturer_Part_Number=CRCW080510R0FKEA, Mouser Price/Stock=https://www.mouser.co.uk/ProductDetail/Vishay-Dale/CRCW080510R0FKEA?qs=LOX6nxTstiaUTSGGiXqphg%3D%3D
S1: "Switch", Manufacturer_Name=LITTELFUSE, Manufacturer_Part_Number="PTS526SM15SMTR2 LFS", Mouser Part Number=611-PTS526SM15SMTR2L, Datasheet Link=https://www.ckswitches.com/media/2780/pts526.pdf, Height=1.65mm, Mouser Price/Stock=https://www.mouser.co.uk/ProductDetail/CK/PTS526SM15SMTR2-LFS?qs=Imq1NPwxi75LpUh6FiCy2w%3D%3D
TP1 TP2 TP3: "Test Pad", Manufacturer_Name="Keystone Electronics", Mouser Part Number=534-5016, Arrow Part Number=5016, Arrow Price/Stock=https://www.arrow.com/en/products/5016/keystone-electronics?utm_currency=USD&region=europe, Datasheet Link=http://www.keyelco.com/product-pdf.cfm?p=1354, Manufacturer_Part_Number=5016, Mouser Price/Stock=https://www.mouser.co.uk/ProductDetail/Keystone-Electronics/5016?qs=qOqV1E1P08QbNAXL8l0G1A%3D%3D
TP4: "Test Pad", Manufacturer_Name="Keystone Electronics", Mouser Part Number=534-5015, Arrow Part Number=5015, Arrow Price/Stock=https://www.arrow.com/en/products/5015/keystone-electronics?utm_currency=USD&region=europe, Datasheet Link=http://www.keyelco.com/product-pdf.cfm?p=1353, Height=1.52mm, Manufacturer_Part_Number=5015, Mouser Price/Stock=https://www.mouser.co.uk/ProductDetail/Keystone-Electronics/5015?qs=qOqV1E1P08ShW56PtUq2FA%3D%3D
TP5 TP6: library part TEST_POINT_1PIN, "1.5mm Bare Test Pad"
U1: "OLED_128x64_I2C"

## Nets (pads, with @x,y where several pads share a name; then routed paths per layer and width w, separated by ;. In a path a pad name is that pad's centre, name@x,y a point inside that pad or via, vN(x,y) a via of type N, cw(c..) or ccw(c..) an arc to the next point about the centre after c; other vN are vias at no path point)
3V3: C5.2 C6.2 C16.2 C17.2 C19.2 IC2.2 IC4.5 R6.1 R14.2 R16.1 R17.2 R18.2 R21.1 U1.1
3V3_A: C3.2 C11.2 C20.2 IC1.5 R1.2 R3.2 R21.2 TP6.1
3V3_OUT: C10.2 IC3.4 IC3.17 R12.1 R13.1
5V: C8.2 C9.2 C15.2 F1.2 IC3.20 IC4.1 IC4.3 R15.1
AUDIO_OUT: C18.1 IC2.4 R5.2 TP1.1
CBUS_0: D5.1 IC3.23
CBUS_1: D4.1 IC3.22
ESP_DTR: IC3.2 Q2.2 R19.1
ESP_RTS: IC3.3 Q1.2 R20.1
GND: C3.1 C4.1 C5.1 C6.1 C7.1 C8.1 C9.1 C10.1 C11.1 C12.1 C13.1 C14.1 C15.1 C16.1 C17.1 C18.2 C19.1 C20.1 D1.1 D2.1 D3.1 D6.2 D7.2 D8.3 IC1.2 IC2.1 IC2.15 IC2.38 IC2.39 IC2.40 IC2.41 IC2.42 IC2.43 IC2.44 IC2.45 IC2.46 IC2.47 IC3.7 IC3.11 IC3.18 IC3.21 IC3.25 IC3.26 IC4.2 J1.A1 J1.A12 J1.B1 J1.B12 J1.MP1 J1.MP2 J1.MP3 J1.MP4 M1.2 R4.1 R10.2 R11.1 S1.3 TP3.1 U1.2
LED_BLU: IC2.28 R7.2
LED_GRN: IC2.27 R8.2
LED_RED: IC2.26 R9.2
MIC_BIAS: C1.1 M1.1 R1.1 TP5.1
NetC1_2: C1.2 C2.1 IC1.4 R2.1
NetC7_2: C7.2 IC2.3 Q1.3 R6.2
NetC13_2: C13.2 C14.2 F1.1 FB1.2
NetD1_2: D1.2 R9.1
NetD2_2: D2.2 R8.1
NetD3_2: D3.2 R7.1
NetD4_2: D4.2 R13.2
NetD5_2: D5.2 R12.2
NetD6_1: D6.1 R15.2
NetD7_1: D7.1 R16.2
NetIC2_25: IC2.25 Q2.3 R14.1 S1.1
NetIC2_34: IC2.34 IC3.1
NetIC2_35: IC2.35 IC3.5
NetJ1_A5: J1.A5 R11.2
NetJ1_B5: J1.B5 R10.1
NetQ1_1: Q1.1 R19.2
NetQ2_1: Q2.1 R20.2
OLED_SCL: IC2.36 R17.1 U1.3
OLED_SDA: IC2.33 R18.1 U1.4
OPA_OUT: C2.2 IC1.1 R2.2 R5.1 TP2.1
USB_D_N: D8.2 IC3.16 J1.A7 J1.B7
USB_D_P: D8.1 IC3.15 J1.A6 J1.B6
VBIAS: C4.2 IC1.3 R3.1 R4.2 TP4.1
VBUS: C12.2 FB1.1 J1.A4 J1.A9 J1.B4 J1.B9
pads on no net: IC2.5 IC2.6 IC2.7 IC2.8 IC2.9 IC2.10 IC2.11 IC2.12 IC2.13 IC2.14 IC2.16 IC2.17 IC2.18 IC2.19 IC2.20 IC2.21 IC2.22 IC2.23 IC2.24 IC2.29 IC2.30 IC2.31 IC2.32 IC2.37 IC3.6 IC3.8 IC3.9 IC3.10 IC3.12 IC3.13 IC3.14 IC3.19 IC3.24 IC3.27 IC3.28 IC4.4 J1.A8 J1.B8 J1.MH1 J1.MH2 S1.2 S1.4 U1.6 U1.7 U1.8 U1.9
copper on no net: | length 268.9
  Top Layer w0.254: 62.738,47.625 ccw(c67.183,47.625) 67.183,43.18 131.191,43.18 ccw(c131.191,47.625) 135.636,47.625 135.636,105.918 ccw(c134.366,105.918) 134.366,107.188 64.008,107.188 ccw(c64.008,105.918) 62.738,105.918 62.738,47.625

## Silkscreen, mask and mechanical layers (free items; w line width, h text height)
Top Overlay:
  text "MIC" at 64.643,104.14 h1
  text "BOOT" at 126.111,85.979 h1
  text "USB-C" at 129.54,71.882 h1
  text "TX" at 119.38,69.469 h1
  text "RX" at 122.047,69.469 h1
  text "5V" at 98.552,49.784 h1
  text "3V3" at 102.108,49.784 h1
  text "Acoustic Guitar Tuner" at 99.568,46.482 h1.52
  text "FLAT" at 74.168,46.355 h1
  text "TUNE" at 80.772,46.355 h1
  text "SHARP" at 86.868,46.355 h1
  text "NF Rev A" at 99.361,43.807 h1.52